# EAGLE board OOK48_Interface (EAGLE 7.7.0)
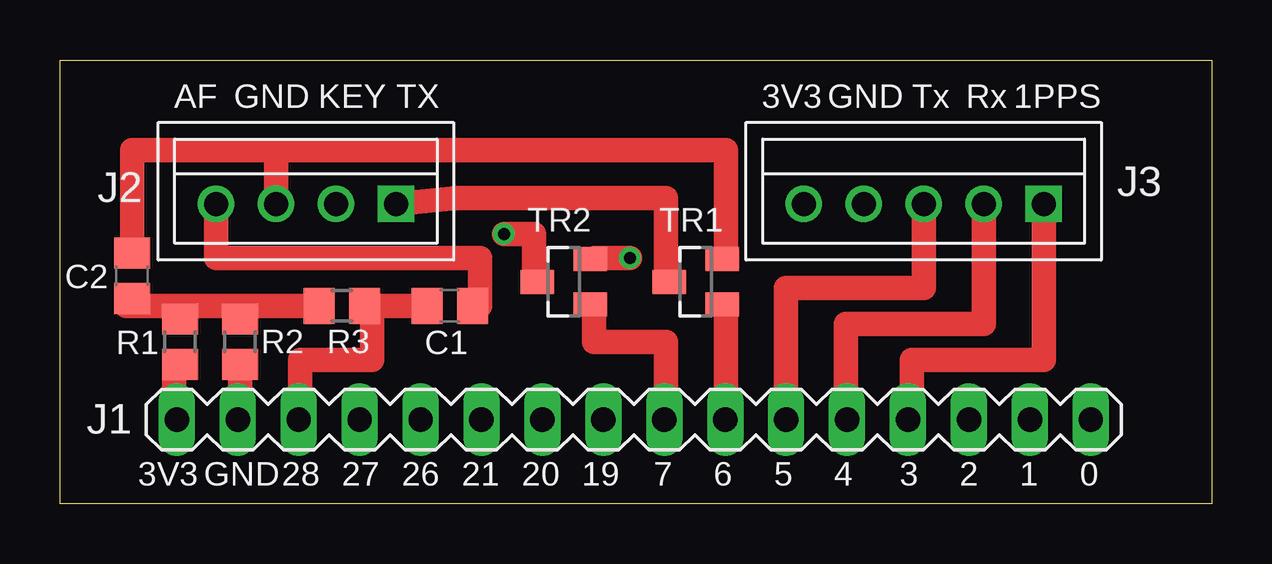
[diagram p0: board, top side]
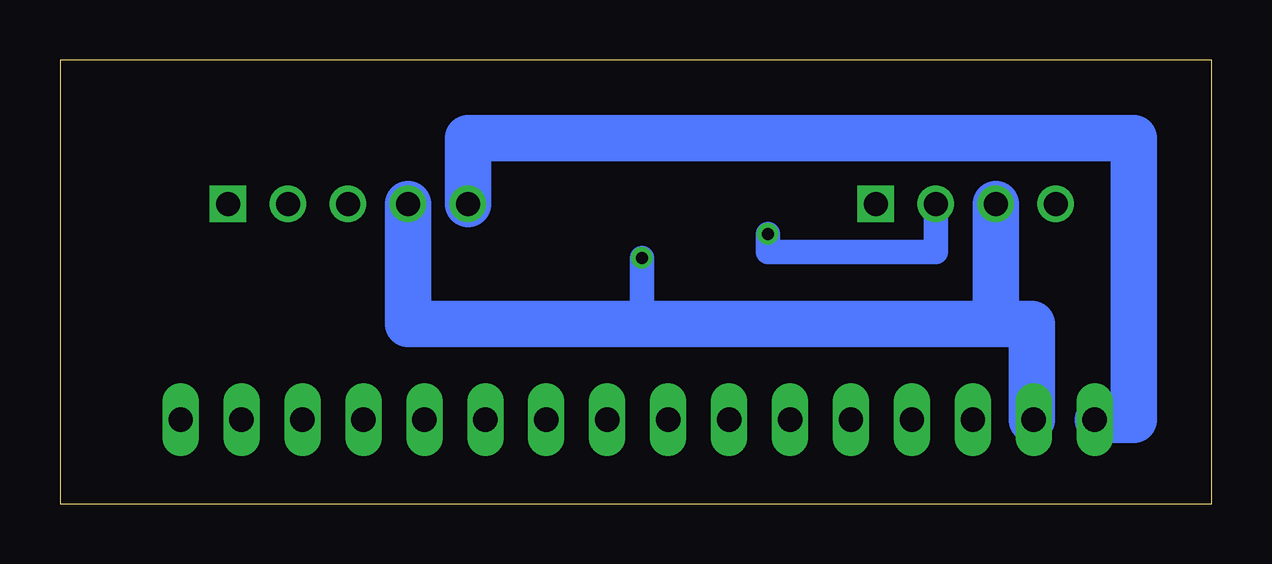
[diagram p1: board, bottom side, seen from below]

Size 48 x 18.5 mm. Coordinates in mm from the lower left corner, seen from the top.
Outline: 0,0 0,18.5 48,18.5 48,0 0,0
Copper layers (1*16): Top 0.035mm / dielectric 1.5mm / Bottom 0.035mm
Design rules "default": minimum track width 10mil, minimum drill 24mil, track to track 8mil, track to pad 8mil, pad to pad 8mil, via to via 8mil, smd to smd 8mil, copper to edge 40mil, drill to drill 8mil, minimum pad ring 10mil, minimum via ring 8mil, stop-mask expansion 4mil, vias tented up to drill 0mil, thermal gap 10mil

## Footprints (pad centres in the part's own frame; a part is rotated, then mirrored left to right if it is on the bottom)
C0805 = smd 1.3 x 1.5: 1 -0.95,0; 2 0.95,0
MA16-1 = drill 1.016 long: 1 -24.13,0; 2 -21.59,0; 3 -19.05,0; 4 -16.51,0; 5 -13.97,0; 6 -11.43,0; 7 -8.89,0; 8 -6.35,0; 9 -3.81,0; 10 -1.27,0; 11 1.27,0; 12 3.81,0; 13 6.35,0; 14 8.89,0; 15 11.43,0; 16 13.97,0
B4B-XH = drill 1 square: P$1 3.75,0 | drill 1: P$2 1.25,0; P$3 -1.25,0; P$4 -3.75,0
B5B-XH = drill 1 square: P$1 5,0 | drill 1: P$2 2.5,0; P$3 0,0; P$4 -2.5,0; P$5 -5,0
R0805 = smd 1.3 x 1.5: 1 -0.95,0; 2 0.95,0
SOT23 = smd 1 x 1.4: 1 -0.95,-1.1; 2 0.95,-1.1; 3 0,1.1

## Placement (x,y rotation side)
C1  100nF  [C0805]  16.25,8.25 180 top
C2  10uF  [C0805]  3,9.5 90 top
J1  16 SIL  [MA16-1]  29,3.5 0 top
J2  [B4B-XH]  10.25,12.5 0 top
J3  [B5B-XH]  36,12.5 0 top
R1  47K  [R0805]  5,6.75 90 top
R2  47K  [R0805]  7.5,6.75 270 top
R3  1K2  [R0805]  11.75,8.25 180 top
TR1  [SOT23]  26.5,9.25 90 top
TR2  [SOT23]  21,9.25 90 top

## Library data of the parts
C1 C2 R1-R3 = eagle-ltspice
J1 = con-lstb
J2 J3 = bt_con-jst-xh
TR1 TR2 = linear

## Nets
S$2: J3.P$2
S$3: J3.P$3
S$11: J2.P$2
S$15: J3.P$5
S$16: J3.P$4

## Tracks (layer width: path | path; a pad name or v marks a point on that pad's centre or on a via)
S$1
  Top 1.016: 40.75,12.5 41,12.5 41,6 35.5,6 35.5,3.5
S$2
  Top 1.016: J3.P$2 38.5,7.5 32.75,7.5 32.75,3.25
S$3
  Top 1.016: J3.P$3 36,9 30.25,9 30.25,3
S$4
  Top 1.016: 9,14.75 9,12.5 | 9,14.75 3,14.75 3,10.75 | 9,14.75 27.75,14.75 27.75,10.5
S$5
  Top 1.016: 27.75,3.25 27.75,8.25
S$6
  Top 1.016: 27.75,10.25 27.75,14.5
S$7
  Top 1.016: 14,12.75 14,12.5 16.5,12.75 25.25,12.75 25.25,9.25
S$8
  Top 1.016: 15,8.25 13,8.25 13,6 10,6 10,3.5
S$9
  Top 1.016: 10.5,8.25 7,8.25
S$10
  Top 1.016: 7.25,8.25 2.75,8.25
S$11  (via drill 0.5)
  Top 1.016: v18.5,11.25 19.75,11.25 19.75,9.25
  Bottom 1.016: J2.P$2 11.5,10.5 18.5,10.5 v18.5,11.25
S$12
  Top 1.016: 7.5,3.5 7.5,5.5
S$13
  Top 1.016: 6.5,12.5 6.5,10.25 17.5,10.25 17.5,8.25
S$14
  Top 1.016: 4.75,3.5 4.75,5.75 5,5.75
S$15
  Bottom 1.93: J3.P$5 31,15.25 3.25,15.25 3.25,3.5 4.75,3.5
S$16
  Bottom 1.93: 7.5,3.5 7.5,7.5 9,7.5 | 9,7.5 9,12.5 | J3.P$4 33.5,7.5 9,7.5
S$17
  Top 1.016: 25.25,3.5 25.25,6.75 22.25,6.75 22.25,8.25
S$19  (via drill 0.5)
  Top 1.016: 22.25,10.25 v23.75,10.25
  Bottom 1.016: v23.75,10.25 23.75,8

## Text on the board
tNames: AF | GND | KEY | TX | 3V3 | GND | Tx | Rx | 1PPS | 3V3 | GND | 28 | 27 | 26 | 21 | 20 | 19 | 7 | 6 | 5 | 4 | 3 | 2 | 1 | 0